# Altium PCB keyModule.PcbDoc
Units mil, origin at the board's own origin, x right, y up, seen from the top; angles counter-clockwise.
Board outline 3720 x 3700 mil, 2 copper layers (Top Layer, Bottom Layer); 95 components, 89 nets, 421 pads, 59 vias.
Unrouted connection lines stored in the file: 1.
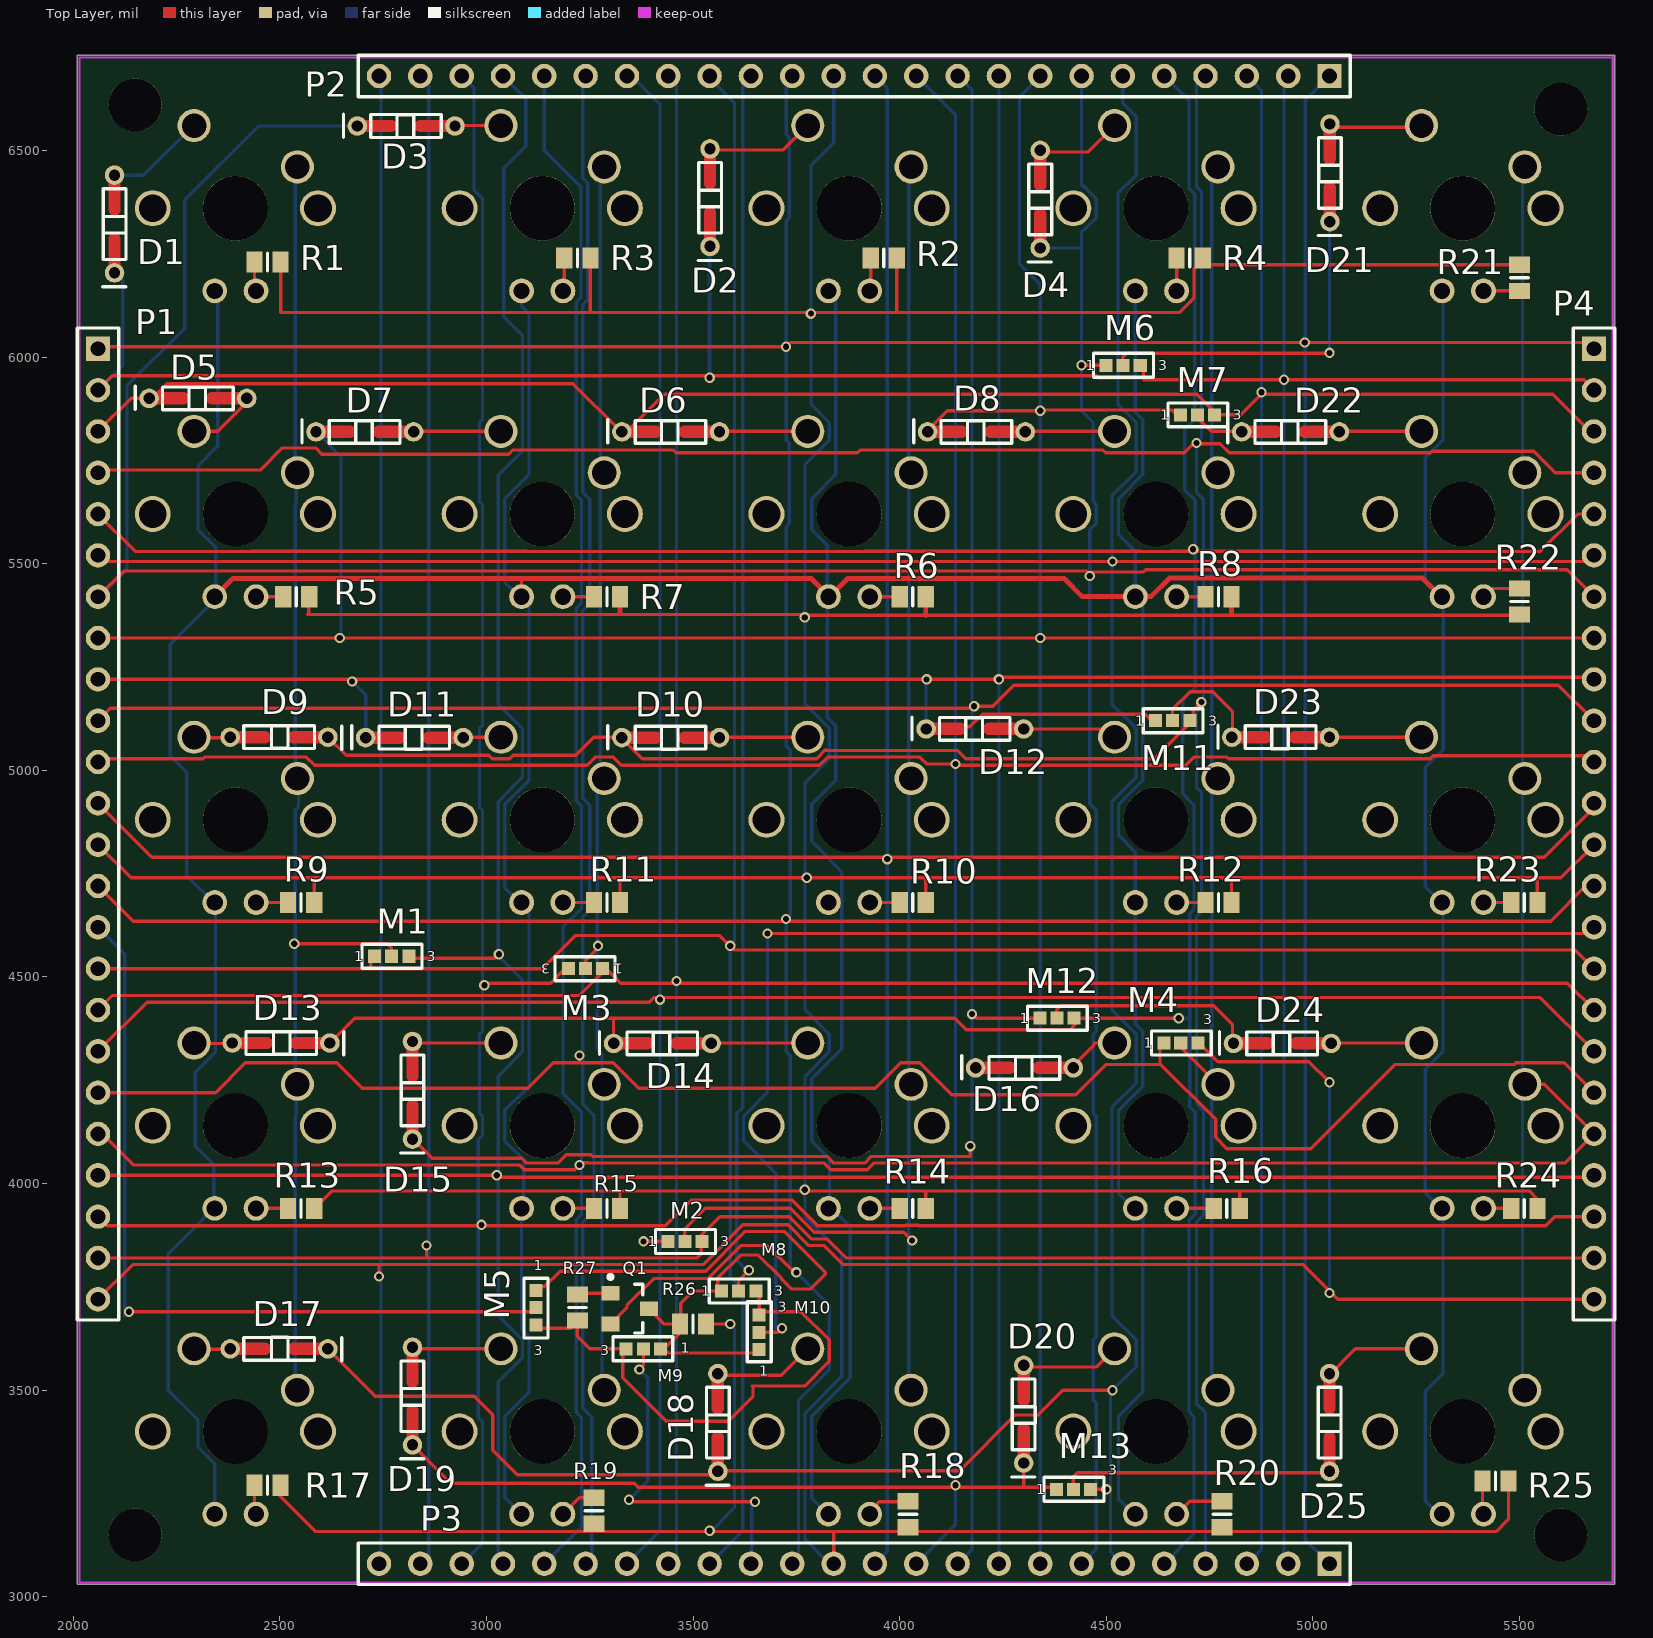
[diagram p0: Top Layer view]
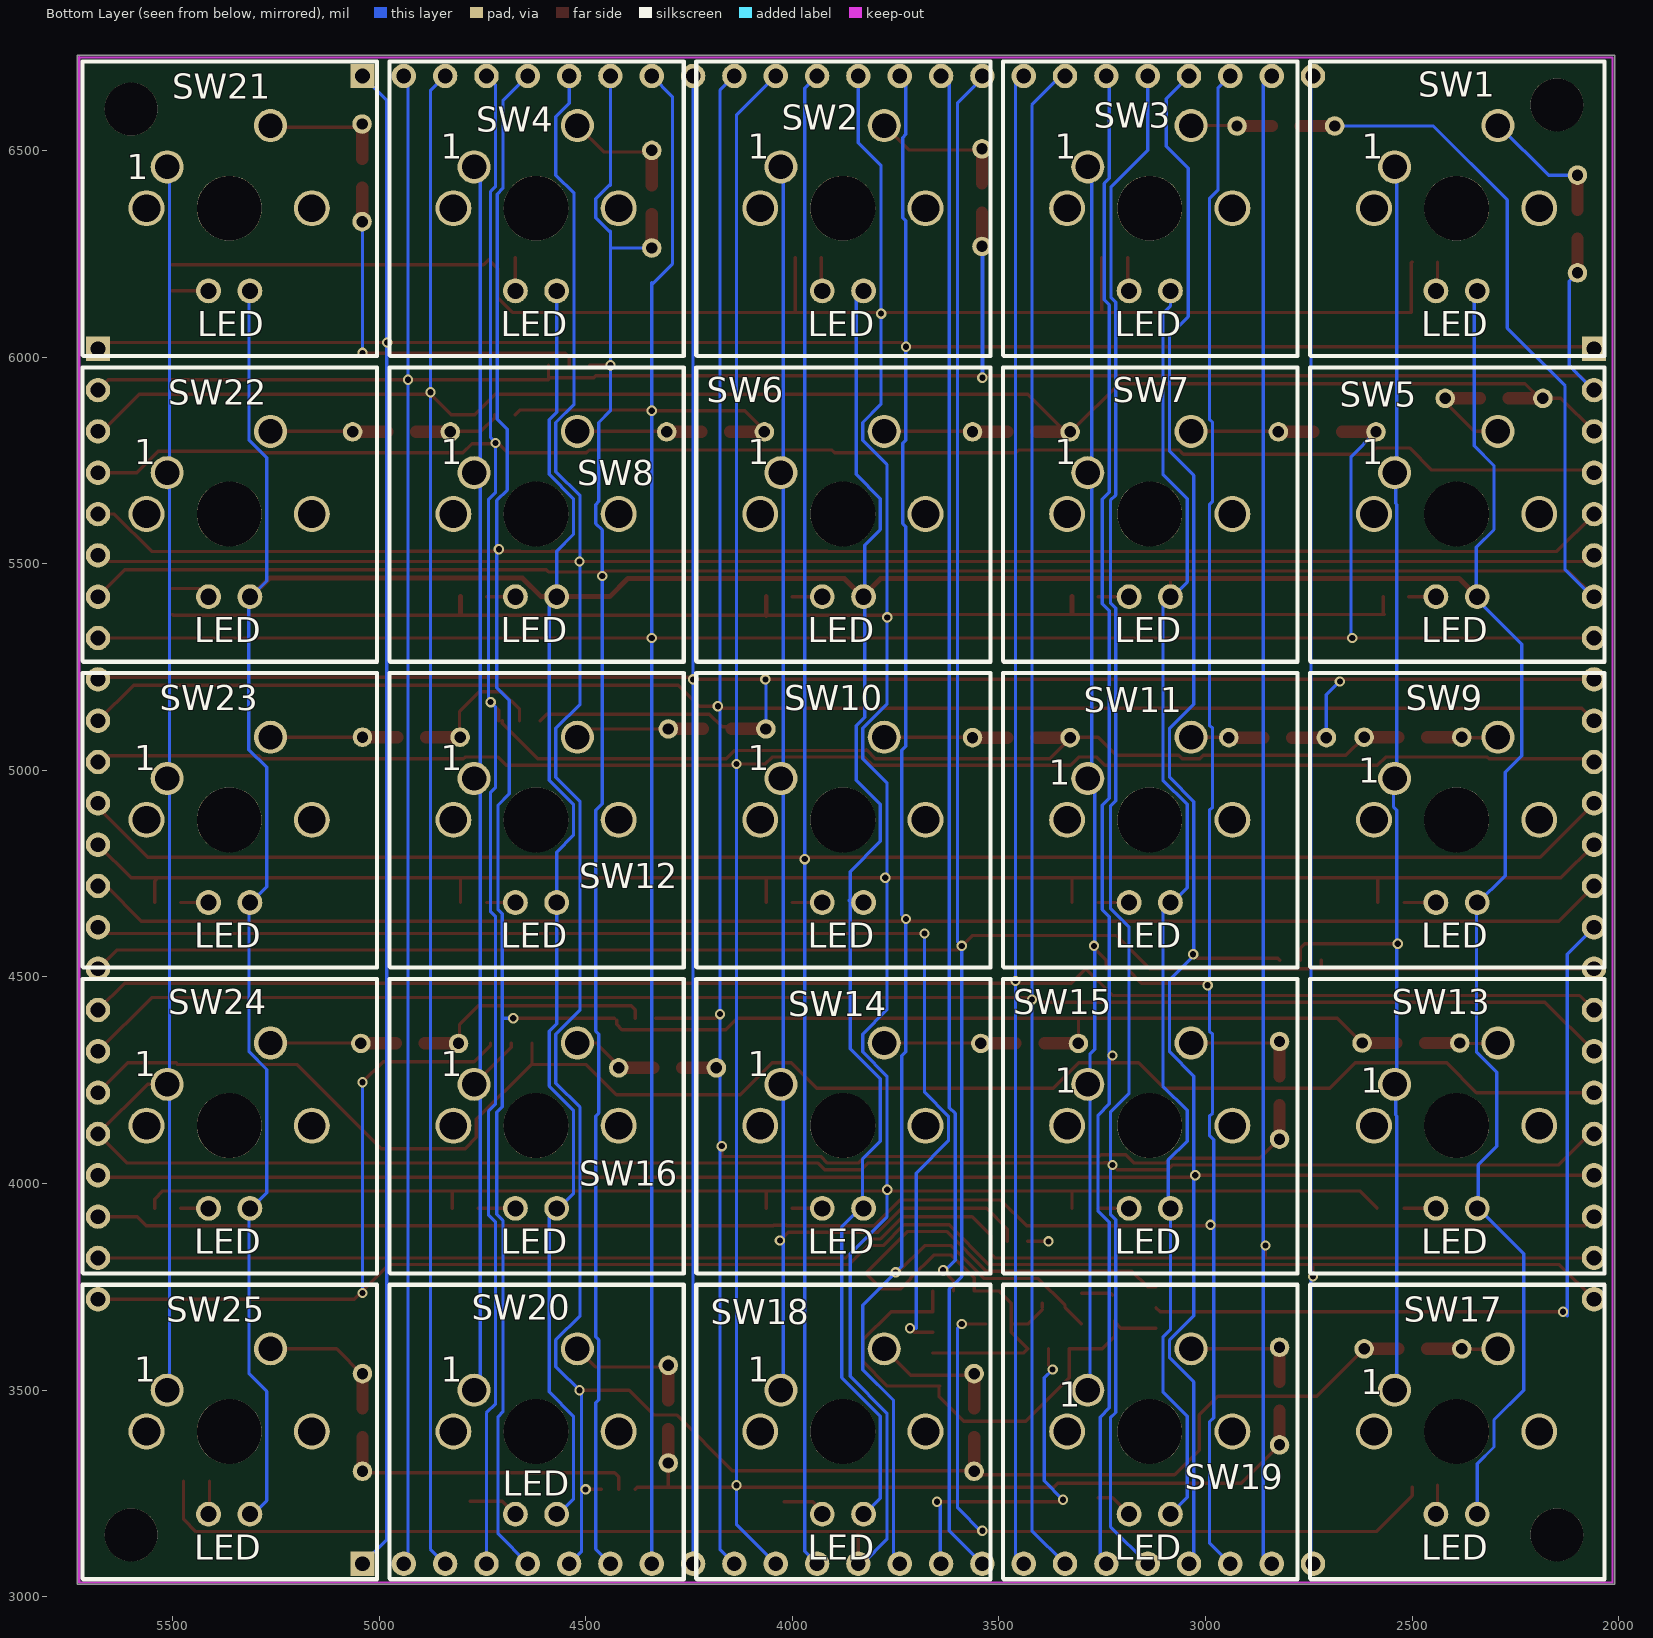
[diagram p1: Bottom Layer view, seen from below]

## Layer stack, top to bottom
Top Layer: signal copper 1.4
Dielectric: dielectric 12.6, FR-4, Dk 4.8
Bottom Layer: signal copper 1.4

## Board outline
2010,3030 5730,3030 5730,6730 2010,6730

## Design rules (kind name [scope] priority, off if disabled: settings)
Clearance [All] p1: gap=8
HoleSize [All] p1: absolutevalues=TRUE maxlimit=175 minlimit=1 maxpercent=80.000 minpercent=20.000
MinimumSolderMaskSliver [All] p1 off: minsoldermaskwidth=10
NetAntennae [All] p1 off: netantennaetolerance=30
PasteMaskExpansion [All] p1 off: expansion=0
PolygonConnect [All] p1: connectstyle=Relief reliefconductorwidth=10 reliefentries=4 polygonreliefangle="90 Angle"
RoomDefinition keyModule [InComponentClass('keyModule')] p1 off: confinementstyle=ConfineIn formatcopy=TRUE lockcomponents=FALSE outline 5790,2970 7780,2970 7780,3960 5790,3960
RoutingVias [All] p1: holewidth=12 width=25 viastyle="Through Hole" minholewidth=28 minwidth=50 maxholewidth=28 maxwidth=50
SilkToSilkClearance [All] p1: silktosilkclearance=1
SilkscreenOverComponentPads [All] p1 off: minsilkscreentomaskgap=20
SolderMaskExpansion [All] p1 off: expansion=4
Width [All] p1: maxlimit=100 minlimit=8 preferedwidth=8
22 further rules are at their usual default settings.

## Components (designator, comment, footprint, x,y, rotation, side; value= is the part's Value field where it differs from the comment)
D1 "1N4148" "AXIAL WITH SOD-323F"#1 2100,6320 r270 top
D2 "1N4148" "AXIAL WITH SOD-323F"#1 3541,6383.78 r270 top locked
D3 "1N4148" "AXIAL WITH SOD-323F"#1 2803.78,6559 r180 top locked
D4 "1N4148" "AXIAL WITH SOD-323F"#1 4340,6380 r270 top
D5 "1N4148" "AXIAL WITH SOD-323F"#1 2300,5900 r180 top locked
D6 "1N4148" "AXIAL WITH SOD-323F"#1 3443.78,5819 r180 top locked
D7 "1N4148" "AXIAL WITH SOD-323F"#1 2703.78,5819 r180 top locked
D8 "1N4148" "AXIAL WITH SOD-323F"#1 4183.78,5819 r180 top locked
D9 "1N4148" "AXIAL WITH SOD-323F"#1 2500,5080 r0 top locked
D10 "1N4148" "AXIAL WITH SOD-323F"#1 3443.78,5079 r180 top locked
D11 "1N4148" "AXIAL WITH SOD-323F"#1 2823.78,5079 r180 top locked
D12 "1N4148" "AXIAL WITH SOD-323F"#2 4180,5100 r180 top
D13 "1N4148" "AXIAL WITH SOD-323F"#1 2504.88,4340 r0 top locked
D14 "1N4148" "AXIAL WITH SOD-323F"#1 3423.78,4339 r180 top locked
D15 "1N4148" "AXIAL WITH SOD-323F"#1 2821,4223.78 r270 top locked
D16 "1N4148" "AXIAL WITH SOD-323F"#1 4300,4280 r180 top locked
D17 "1N4148" "AXIAL WITH SOD-323F"#1 2500,3600 r0 top locked
D18 "1N4148" "AXIAL WITH SOD-323F"#1 3560,3420 r270 top locked
D19 "1N4148" "AXIAL WITH SOD-323F"#3 2821,3483.78 r270 top locked
D20 "1N4148" "AXIAL WITH SOD-323F"#1 4300,3440 r270 top locked
D21 "1N4148" "AXIAL WITH SOD-323F"#1 5041,6443.78 r270 top locked
D22 "1N4148" "AXIAL WITH SOD-323F"#1 4943.78,5819 r180 top locked
D23 "1N4148" "AXIAL WITH SOD-323F"#1 4920,5080 r180 top locked
D24 "1N4148" "AXIAL WITH SOD-323F"#1 4923.78,4339 r180 top locked
D25 "1N4148" "AXIAL WITH SOD-323F"#1 5040,3420 r270 top locked
M1 "solder Mux" SOLDERSELECT 2720,4550 r0 top
M2 "solder Mux" SOLDERSELECT 3430,3860 r0 top
M3 "solder Mux" SOLDERSELECT 3290,4520 r180 top
M4 "solder Mux" SOLDERSELECT 4630,4340 r0 top
M5 "solder Mux" SOLDERSELECT 3120,3750 r270 top
M6 "solder Mux" SOLDERSELECT 4490,5980 r0 top
M7 "solder Mux" SOLDERSELECT 4670,5860 r0 top
M8 "solder Mux" SOLDERSELECT 3560,3740 r0 top
M9 "solder Mux" SOLDERSELECT 3430,3600 r180 top
M10 "solder Mux" SOLDERSELECT 3660,3590 r90 top
M11 "solder Mux" SOLDERSELECT 4610,5120 r0 top
M12 "solder Mux" SOLDERSELECT 4330,4400 r0 top
M13 "solder Mux" SOLDERSELECT 4370,3260 r0 top
P1 "Header 24" HDR1X24 2060,6020 r270 top locked
P2 "Header 24" HDR1X24 5040,6680 r180 top locked
P3 "Header 24" HDR1X24 5040,3080 r180 top locked
P4 "Header 24" HDR1X24 5680,6020 r270 top locked
Q1 "NPN_TRANSISTOR" SOT23-3 3300,3734.8 r0 top
R1 "Res Semi" RESC2012L 2470,6230 r180 top
R2 "Res Semi" RESC2012L 3961.5,6240 r180 top
R3 "Res Semi" RESC2012L 3220,6240 r180 top
R4 "Res Semi" RESC2012L 4701.5,6240 r180 top
R5 "Res Semi" RESC2012L 2540,5420 r180 top
R6 "Res Semi" RESC2012L 4031.5,5420 r180 top
R7 "Res Semi" RESC2012L 3291.5,5420 r180 top
R8 "Res Semi" RESC2012L 4771.5,5420 r180 top
R9 "Res Semi" RESC2012L 2551.5,4680 r180 top
R10 "Res Semi" RESC2012L 4031.5,4680 r180 top
R11 "Res Semi" RESC2012L 3291.5,4680 r180 top
R12 "Res Semi" RESC2012L 4771.5,4680 r180 top
R13 "Res Semi" RESC2012L 2551.5,3940 r180 top
R14 "Res Semi" RESC2012L 4031.5,3940 r180 top
R15 "Res Semi" RESC2012L 3291.5,3940 r180 top
R16 "Res Semi" RESC2012L 4791.5,3940 r180 top
R17 "Res Semi" RESC2012L 2470,3270 r180 top
R18 "Res Semi" RESC2012L 4020,3200 r90 top
R19 "Res Semi" RESC2012L 3260,3208.5 r90 top
R20 "Res Semi" RESC2012L 4780,3200 r90 top
R21 "Res Semi" RESC2012L 5500,6191.5 r270 top
R22 "Res Semi" RESC2012L 5500,5408.5 r90 top
R23 "Res Semi" RESC2012L 5511.5,4680 r180 top
R24 "Res Semi" RESC2012L 5511.5,3940 r180 top
R25 "Res Semi" RESC2012L 5441.5,3280 r180 top
R26 "Res Semi" RESC2012L 3500,3660 r0 top
R27 "Res Semi" RESC2012L 3220,3700 r90 top
SW1 "CherrySwitch" CherryMxSwitch 2542.5,6460 r180 bottom locked
SW2 "CherrySwitch" CherryMxSwitch 4027.5,6460 r180 bottom locked
SW3 "CherrySwitch" CherryMxSwitch 3285,6460 r180 bottom locked
SW4 "CherrySwitch" CherryMxSwitch 4770,6460 r180 bottom locked
SW5 "CherrySwitch" CherryMxSwitch 2542.5,5720 r180 bottom locked
SW6 "CherrySwitch" CherryMxSwitch 4027.5,5720 r180 bottom locked
SW7 "CherrySwitch" CherryMxSwitch 3285,5720 r180 bottom locked
SW8 "CherrySwitch" CherryMxSwitch 4770,5720 r180 bottom locked
SW9 "CherrySwitch" CherryMxSwitch 2542.5,4980 r180 bottom locked
SW10 "CherrySwitch" CherryMxSwitch 4027.5,4980 r180 bottom locked
SW11 "CherrySwitch" CherryMxSwitch 3285,4980 r180 bottom locked
SW12 "CherrySwitch" CherryMxSwitch 4770,4980 r180 bottom locked
SW13 "CherrySwitch" CherryMxSwitch 2542.5,4240 r180 bottom locked
SW14 "CherrySwitch" CherryMxSwitch 4027.5,4240 r180 bottom locked
SW15 "CherrySwitch" CherryMxSwitch 3285,4240 r180 bottom locked
SW16 "CherrySwitch" CherryMxSwitch 4770,4240 r180 bottom locked
SW17 "CherrySwitch" CherryMxSwitch 2542.5,3500 r180 bottom locked
SW18 "CherrySwitch" CherryMxSwitch 4027.5,3500 r180 bottom locked
SW19 "CherrySwitch" CherryMxSwitch 3285,3500 r180 bottom locked
SW20 "CherrySwitch" CherryMxSwitch 4770,3500 r180 bottom locked
SW21 "CherrySwitch" CherryMxSwitch 5512.5,6460 r180 bottom locked
SW22 "CherrySwitch" CherryMxSwitch 5512.5,5720 r180 bottom locked
SW23 "CherrySwitch" CherryMxSwitch 5512.5,4980 r180 bottom locked
SW24 "CherrySwitch" CherryMxSwitch 5512.5,4240 r180 bottom locked
SW25 "CherrySwitch" CherryMxSwitch 5512.5,3500 r180 bottom locked

## Footprints (in the part's own frame and the unit in brackets; to place one, negate y for a bottom-side part, rotate by r counter-clockwise, add the part's x,y. Pads: shape width x height; smd on the part's side, far side on the other; paste and mask are expansions set on the pad)
"AXIAL WITH SOD-323F"#1 [mm]
  round 1.2 hole 0.7: 1(2.952,0) 2(-3.048,0)
  Top Layer lines w0.762: 2.921,0 0.864,0 ; -0.914,0 -3.048,0
  silkscreen extent -2.21,-0.74 3.81,0.71
"AXIAL WITH SOD-323F"#2 [mm]
  round 1.2 hole 0.7: 1(2.952,0) 2(-3.048,0)
  Top Layer lines w0.762: 2.921,0 1.143,0 0.864,0 ; -0.914,0 -3.048,0
  silkscreen extent -2.21,-0.74 3.81,0.71
"AXIAL WITH SOD-323F"#3 [mm]
  round 1.2 hole 0.7: 1(2.952,0) 2(-3.048,0)
  Top Layer lines w0.762: 2.921,0 2.738,0 0.864,0 ; -0.914,0 -3.048,0
  silkscreen extent -2.21,-0.74 3.81,0.71
CherryMxSwitch [mil] "Cherry Mx Switch with holes for LED"
  round 80 hole 59: 1(0,0) 2(250,100)
  round 60 hole 39: 3(100,-300) 4(200,-300)
  round 87 hole 67: 5(-50,-100) 7(350,-100)
  round 157 hole 157 unplated: 6(150,-100)
  silkscreen extent -205,-458 508,255
HDR1X24 [mm] "Connector; Header; 24 Position"
  rect 1.5x1.5 hole 0.9: 1(0,0)
  round 1.5 hole 0.9: 2(2.54,0) 3(5.08,0) 4(7.62,0) 5(10.16,0) 6(12.7,0) 7(15.24,0) 8(17.78,0) 9(20.32,0) 10(22.86,0) 11(25.4,0) 12(27.94,0) 13(30.48,0) 14(33.02,0) 15(35.56,0) 16(38.1,0) 17(40.64,0) 18(43.18,0) 19(45.72,0) 20(48.26,0) 21(50.8,0) 22(53.34,0) 23(55.88,0) 24(58.42,0)
  silkscreen extent -1.27,-1.27 59.69,1.27
RESC2012L [mm] "Chip Resistor, Body 2.0x1.3mm, IPC High Density"
  rect 1x1.3 smd: 1(-0.8,0) 2(0.8,0)
  silkscreen extent 0,-0.55 0,0.55, body extent -1.07,-0.7 1.07,0.7, height 2.54
SOLDERSELECT [mm]
  rect 0.8x0.8 smd: 1(0.229,0) 2(1.27,0) 3(2.337,0)
  silkscreen extent -0.53,-0.74 3.15,0.74
SOT23-3 [mm] "SOT23, 3-Leads, Body 3.0x2.8mm (max), Pitch 0.95mm, IPC Medium Density"
  rect 1.1x0.9 smd: 1(0,0) 2(0,-1.9) 3(2.36,-0.95)
  silkscreen extent -0.12,-2.45 1.98,1.12, body extent 0.38,-2.47 1.98,0.57, height 1.4

## Part data
D1 D2 D3 D4 D5 D6 D7 D8 D9 D10 D11 D12 D13 D14 D15 D16 D17 D18 D19 D20 D21 D22 D23 D24 D25: library part 5283, "Diode, 1N4148, 75V, 0.4 in., DO-35, 150mA, Switching, 500mW, Any"
P1 P2 P3 P4: "Header, 24-Pin"
Q1: library part 265442, "Transistor, MMBT4401, 40V, SOT23-3, 500mA, NPN, Transistor, On Semi: MMBT4401LT1"
R1 R2 R3 R4 R5 R6 R7 R8 R9 R10 R11 R12 R13 R14 R15 R16 R17 R18 R19 R20 R21 R22 R23 R24 R25 R26 R27: "Semiconductor Resistor"
SW1 SW2 SW3 SW4 SW5 SW6 SW7 SW8 SW9 SW10 SW11 SW12 SW13 SW14 SW15 SW16 SW17 SW18 SW19 SW20 SW21 SW22 SW23 SW24 SW25: "Cherry MX Switch layout"

## Free pads (board coordinates)
  round 128 hole 128: 0(2150,3150) 0(2150,6610) 0(5600,3150) 0(5600,6600)

## Via types
v1: diameter 25, hole 15, Top Layer to Bottom Layer, 59 vias

## Nets (pads, with @x,y where several pads share a name; then routed paths per layer and width w, separated by ;. In a path a pad name is that pad's centre, name@x,y a point inside that pad or via, vN(x,y) a via of type N, cw(c..) or ccw(c..) an arc to the next point about the centre after c; other vN are vias at no path point)
+5: P1.13 P2.13 P3.13 P4.13 R1.1 R2.1 R3.1 R4.1 R5.1 R6.1 R7.1 R8.1 R9.1 R10.1 R11.1 R12.1 R13.1 R14.1 R15.1 R16.1 R17.1 R18.1 R19.1 R20.1 R21.1 R22.1 R23.1 R24.1 R25.1 R26.2 | length 21380.4
  Top Layer w8: P1.13 2140,4740 5600,4740 P4.13 ; R17.1@2500,3265 2500,3245 2587,3158 5443,3158 5472.99,3187.99 R25.1 ; R1.1@2500,6230 2502.25,6227.75 2502.25,6107.75 4677.15,6107.75 4712,6142.6 4712,6212 4735,6235 4747.01,6222.99 R21.1 ; R5.1@2570,5420 2570,5380 2567.01,5377.01 v1@3770,5377.01 ; R9.1 2582.99,4737.99 ; R13.1@2585,3940 2627,3982 5523,3982 5542.99,3962.01 R24.1 ; 3250,6110 3251.5,6111.5 R3.1 ; R15.1 3322.99,3977.99 ; R11.1 3322.99,4737.99 ; R26.2 v1(3590,3660) ; v1(3770,5370) v1@3770,5377.01 ; P3.13 3840,3153.1 ; 3992.99,6112.01 R2.1 ; R14.1 4062.99,3977.99 ; R10.1 4062.99,4737.99 ; R12.1 4802.99,4737.01 ; R16.1 4822.99,3977.99 ; R22.1 5497.99,5375 4062.99,5375 3772.01,5375 v1@3770,5377.01 ; 5535,4740 5542.99,4732.01 R23.1
  Top Layer w12: 3322.99,5382.01 R7.1 ; 4062.99,5375 R6.1 ; 4802.99,5382.01 R8.1
  Bottom Layer w8: v1(3540,3160) 3540,3155 3600,3215 3600,3650 v1(3590,3660) v1@3584,3654 ; v1(3770,3985) v1@3771,3985 ; v1(3775,4740) v1@3771,4740 ; v1@3780,6099.5 v1@3785.5,6105 ; P3.13 3830,3080 3771,3139 3771,3444.11 3860,3533.11 3860,3830 3771,3919 v1@3771,3985 ; P2.13 3840,6518.5 3785.5,6464 v1@3785.5,6105 ; v1@3771,3985 3771,4259.96 3829.5,4318.46 3829.5,4361.54 3771,4420.04 v1@3771,4740 ; v1@3771,4740 3771,4969.5 3829.5,5028 3829.5,5101.54 3771,5160.04 3771,5739.96 3829.5,5798.46 3829.5,5841.54 3785.5,5885.54 v1@3785.5,6105
  other v1: 3785,6105
COLUMN1: M1.2 SW1.1 SW5.1 SW9.1 SW13.1 SW17.1 | length 3244.3
  Top Layer w8: v1(2535,4580) 2760,4580 2770,4570 M1.2@2770,4540
  Bottom Layer w8: SW17.1@2540,3500 2537,3503 2537,4162.99 2540,4165.99 2540,4240 2537,4243 2537,4902.99 2545,4910.99 2545,4975 2537,4983 2537,5642.99 2540,5645.99 2540,5720 2537,5723 2537,6454.5 SW1.1
COLUMN2: M3.2 SW3.1 SW7.1 SW11.1 SW15.1 SW19.1 | length 3041.4
  Top Layer w8: M3.2 3240,4540 3270,4570 v1(3270,4575)
  Bottom Layer w8: SW19.1 3279.5,3505.5 3279.5,4313.9 3268.16,4325.24 3268.16,4958.16 3275,4965 3275,6450 SW3.1
COLUMN3: M2.2 SW2.1 SW6.1 SW10.1 SW14.1 SW18.1 | length 3597.3
  Top Layer w8: M2.2 3480,3890 3530,3940 3735,3940 3793,3882 4010,3882 v1(4030,3862)
  Bottom Layer w8: SW18.1@4022,3498 4022,6454.5 SW2.1
COLUMN4: M4.2 SW4.1 SW8.1 SW12.1 SW16.1 SW20.1 | length 3106.9
  Top Layer w8: M4.2 4680,4330 SW16.1
  Bottom Layer w8: SW4.1@4764.5,6459.5 4755,6450 4755,3515 SW20.1
GND: P1.1 P1.14 P2.1 P2.14 P3.1 P3.14 P4.1 P4.14 Q1.2 | length 15236.3
  Top Layer w8: P1.14 2145,4635 5575,4635 5660,4720 P4.14 ; P1.1 2065,6025 v1(3725,6025) 3735,6035 5665,6035 P4.1 ; Q1.2 3340,3700 3340,3705 3405,3770 3535.25,3770 3615.25,3850 3680,3850 3742,3788 3747,3788 v1(3750,3785)
  Bottom Layer w8: P3.14 3755,3095 3755,3475 3829.5,3549.5 3829.5,3705.5 3735,3800 3735,4308.96 3725.5,4318.46 3725.5,4640.5 3735,4650 3735,5048.96 3725.5,5058.46 3725.5,5589.51 3733,5597.01 3733,5790.96 3725.5,5798.46 3725.5,6329.51 3733,6337.01 3733,6530.96 3725.5,6538.46 3725.5,6665.5 P2.14 ; P3.1 4981.53,3138.47 4981.53,6621.53 P2.1
  other v1: 3725,4640 4980,6035
KEYINPUT0: D1.1 D2.1 M6.3 P1.2 P2.2 P3.2 P4.2 | length 7923.1
  Top Layer w8: P1.2 2095,5955 4475.53,5955 4480.53,5950 4590,5950 M6.3@4590,5980 ; 4590,5945 v1(4930,5945) 5655,5945 P4.2
  Bottom Layer w8: P1.2 2100,5960 ; D1.1 2120,6183.78 2120,5980 2100,5960 ; 2101.53,5961.53 2100,5960 ; P3.2 4930,3090 v1(4930,5945) ; P2.2 4930,6670 v1@4930,5950 ; v1(4930,5945) v1@4930,5950 ; v1(4930,5945) v1@4930,5950
  Bottom Layer w10: v1(3540,5950) D2.1@3540,6263.78
KEYINPUT1: D5.1 D6.1 M7.3 P1.3 P2.3 P3.3 P4.3 | length 7457
  Top Layer w8: P1.3 2140,5900 2191.38,5900 2227,5935.62 3209.38,5935.62 3320,5825 3345,5825 3430,5910 4718.47,5910 4768.47,5860 4825,5860 4875,5910 5580,5910 5670,5820 P4.3
  Bottom Layer w8: P3.3 4875.5,3115.5 v1(4875.5,5914.5) 4875.5,6644.5 P2.3
KEYINPUT2: D9.1 D10.1 M11.3 P1.4 P2.4 P3.4 P4.4 | length 9639.9
  Top Layer w8: P1.4 2066.5,5726.5 2452.83,5726.5 2506.33,5780 2586.5,5780 2601.5,5765 3053.54,5765 3063.54,5775 3451.65,5775 3458.65,5768 3897.51,5768 3904.51,5775 4491.46,5775 4498.46,5768 4688,5768 4710,5790 4775,5790 4797,5768 5284.04,5768 5288.04,5772 5534.04,5772 5586.04,5720 P4.4 ; D9.1 2660.22,5036 3005.46,5036 3013.46,5028 3056.54,5028 3064.54,5036 3216,5036 3260,5080 3325,5080 3377,5028 3799.04,5028 3819.04,5048 ; 3820.52,5049.48 3822,5048 4139.33,5048 4159.33,5028 4410,5028 ; 4405,5028 4410,5028 ; M11.3 4702,5113.53 4616.47,5028 4410,5028 ; M11.3@4710,5120 4710,5145 v1(4730,5165)
  Bottom Layer w8: v1(4718,5792) v1@4718,5790 ; P3.4 4740,3445 4718,3467 4718,3905.98 4735,3922.98 4735,4175.61 4718,4192.61 4718,4645.98 4730,4657.98 4730,4946.46 4718,4958.46 4718,5153 4735,5170 4735,5655.61 4718,5672.61 v1@4718,5790 ; P2.4 4718,6658 4718,6412.61 4730,6400.61 4730,5805 4718,5793 v1@4718,5790
KEYINPUT3: D13.1 D14.1 M12.3 P1.5 P2.5 P3.5 P4.5 | length 9617.8
  Top Layer w8: P1.5 2150.5,5529.5 2429.99,5529.5 2430.49,5530 3097.01,5530 3097.51,5529.5 3914.99,5529.5 3915.49,5530 4582.01,5530 4582.51,5529.5 4657.49,5529.5 4657.99,5530 4930,5530 4930.5,5529.5 5550.49,5529.5 5640.99,5620 P4.5 ; D13.1 2681.1,4400 4132.67,4400 4160.42,4372.25 4412.25,4372.25 4425,4385 M12.3@4425,4395 ; D14.1 3307.56,4400 ; M12.3@4430,4400 v1(4675,4400)
  Bottom Layer w8: P3.5 4712,3152 4712,3435.99 4700,3447.99 4700,3910.6 4715,3925.6 4715,4172.99 4702,4185.99 4702,4652.6 4712,4662.6 4712,4915.99 4685,4942.99 4685,5170 4715,5200 v1@4715,5530 ; P2.5 4700,6620 4700,6407.99 4714,6393.99 4714,5849 4690,5825 4690,5677.99 4715,5652.99 v1@4715,5530 ; v1(4675,4400) 4700,4400 ; v1(4710,5535) 4710,5530 v1@4715,5530
KEYINPUT4: D17.1 D18.1 M13.3 P1.6 P2.6 P3.6 P4.6 | length 9663.5
  Top Layer w8: P1.6 2075,5505 v1@4506.5,5505 ; D17.1 2731.22,3485 2970,3485 3015,3440 3015,3355 3075,3295 3550,3295 3560,3305 4145,3305 4280,3440 4335,3440 4395,3500 v1(4515,3500) ; M13.3 v1@4505,3260 ; v1@4515,5513.5 4523.5,5505 5665,5505 P4.6
  Bottom Layer w8: P3.6 4510,3110 4510,3495 4572,3557 4572,3621.54 4513.5,3680.04 4513.5,4184.11 4572,4242.61 4572,4361.54 4513.5,4420.04 4513.5,4924.11 4572,4982.61 4572,5101.54 4513.5,5160.04 4513.5,5664.11 4572,5722.61 4572,5841.54 4528,5885.54 4528,6395.99 4572,6439.99 4572,6581.54 4540,6613.54 P2.6
  other v1: 4500,3260 4515,5505
KEYINPUT5: D3.1 D4.1 M6.1 P1.7 P2.7 P3.7 P4.7 | length 9086.4
  Top Layer w8: P1.7 2122,5482 4453,5482 v1@4460,5475 ; v1(4440,5980) M6.1@4490,5980 ; v1(4460,5470) v1@4460,5475 ; P4.7 5615,5485 4595,5485 4590,5480 4465,5480 v1@4460,5475
  Bottom Layer w8: P1.7@2060,5415 2130,5485 2130,5930 2270,6070 2270,6380 2449,6559 D3.1 ; D4.1 4438.78,6263.78 4440,6265 ; P3.7 4430,3090 4450,3090 4475.5,3115.5 4475.5,3469.5 4468,3477 4468,3621.54 4475.5,3629.04 4475.5,4162.99 4468,4170.49 4468,4361.54 4475.5,4369.04 4475.5,4902.99 4460,4918.49 v1(4460,5470) 4460,5581.51 4475.5,5597.01 4475.5,5642.99 4468,5650.49 4468,5841.54 4440,5869.54 v1(4440,5980) 4440,6265 ; P2.7 4440,6415.5 4442.99,6415.5 4475.5,6382.99 4475.5,6337.01 4442.99,6304.5 4440,6304.5 4440,6265
KEYINPUT6: D7.1 D8.1 M7.1 P1.8 P2.8 P3.8 P4.8 | length 8426.2
  Top Layer w8: P1.8 v1(2645,5320) v1(4340,5320) P4.8 ; D8.1@4065,5820 4115,5870 v1(4340,5870) 4342,5872 4658,5872 M7.1@4670,5860
  Bottom Layer w8: D7.1 2648,5758.56 v1@2648,5320 ; v1(2645,5320) v1@2648,5317 ; P3.8 v1(4340,5320) v1(4340,5870) 4340,6175 ; 4340,6180 4340,6175 ; P2.8 4290,6630 4290,6225 4340,6175
KEYINPUT7: D11.1 D12.1 M11.1 P1.9 P2.9 P3.9 P4.9 | length 7990.4
  Top Layer w8: P1.9 v1(4240,5220) 4245,5225 5675,5225 P4.9 ; 4135,5100 4140,5105 4170,5105 4200.62,5135.62 4594.38,5135.62 M11.1@4610,5120
  Bottom Layer w8: v1(2675,5215) 2707.56,5182.44 D11.1 ; D12.1 4063.78,5218.78 v1(4065,5220) ; P3.9 P2.9
KEYINPUT8: D15.1 D16.1 M12.1 P1.10 P2.10 P3.10 P4.10 | length 8901.5
  Top Layer w8: P1.10 2090,5150 4175,5150 v1(4180,5155) 4225,5155 4276,5206 5594,5206 P4.10 ; D15.1 2822.44,4107.56 2869,4061 3086.01,4061 3097.51,4049.5 3172.49,4049.5 3192.99,4070 3252.33,4070 3256.83,4065.5 3824.01,4065.5 3840.01,4049.5 3914.99,4049.5 3930.99,4065.5 4170.5,4065.5 v1(4170.5,4090.5) ; v1(4175,4410) 4185,4400 M12.1@4330,4400
  Bottom Layer w8: P3.10 4175,3115 v1(4175,4410) 4175,6645 P2.10
KEYINPUT9: D19.1 D20.1 M13.1 P1.11 P2.11 P3.11 P4.11 | length 9039.1
  Top Layer w8: P1.11 2068,5028 2314.04,5028 2318.04,5032 2564.04,5032 2584.04,5012 3243.46,5012 3263.46,5032 3306.54,5032 3326.54,5012 3805.67,5012 3825.67,5032 4049.04,5032 4066.04,5015 4130,5015 4133,5012 4692,5012 4712,5032 4791.54,5032 4795.54,5028 5284.04,5028 5291.04,5035 5665,5035 P4.11 ; D19.1@2821,3376 D19.1 2913.56,3275 3357.33,3275 3367.33,3265 4130,3265 v1(4135,3270) 4140,3265 4300,3265 ; D20.1 4300,3265 ; M13.1@4380,3260 4375,3265 4300,3265
  Bottom Layer w8: P3.11 4135,3175 v1(4135,3270) v1(4135,5015) 4135,6585 P2.11
KEYINPUT10: P1.12 P2.12 P3.12 P4.12 | length 7363.3
  Top Layer w8: P1.12 2190.5,4789.5 v1@3970,4789.5 ; v1(3970,4785) v1@3970,4789.5 ; P4.12 5680,4910 5559.5,4789.5 v1@3970,4789.5
  Bottom Layer w8: P3.12 3970,3110 3970,6650 P2.12
KEYOUTPUT0: M1.1 P1.16 P2.16 P3.16 P4.16 | length 7380.8
  Top Layer w8: P1.16 2720,4520 ; M1.1@2720,4540 2720,4520 ; P4.16 5635,4565 3600,4565 3565,4600 3215,4600 3135,4520 2720,4520
  Bottom Layer w8: P3.16 3620,3160 3620,3745 3590,3775 v1(3590,4575) 3600,4585 3600,6615 3540,6675 P2.16
KEYOUTPUT1: M3.1 P1.17 P2.17 P3.17 P4.17 | length 7307.8
  Top Layer w8: P1.17 2095,4455 3225,4455 3290,4520 3325,4485 v1@3460,4485 ; v1(3460,4490) v1@3460,4485 ; P4.17 5615,4485 v1@3460,4485
  Bottom Layer w8: P3.17@3460,3080 v1(3460,4490) P2.17@3460,6680
KEYOUTPUT2: M2.1 P1.18 P2.18 P3.18 P4.18 | length 7449.8
  Top Layer w8: P1.18 2179,4439 3394,4439 3405,4450 5550,4450 P4.18 ; v1(3380,3860) M2.1@3430,3860
  Bottom Layer w8: P3.18 3420,3160 3420,6610 3350,6680 P2.18
  other v1: 3420,4445
KEYOUTPUT3: M4.1 P1.19 P2.19 P3.19 P4.19 | length 7786.4
  Top Layer w8: P1.19 2344.51,4220 2416.51,4292 2638,4292 2699.5,4230.5 3100.5,4230.5 3162,4292 3225,4292 ; v1(3225,4310) 3225,4292 ; 4630,4290 M4.1@4630,4340 ; P4.19 5608,4292 5490.96,4292 5486.96,4288 5198,4288 4994.5,4084.5 4791.51,4084.5 4764.5,4111.51 4764.5,4155.5 4632,4288 4498.46,4288 4425.46,4215 4126.04,4215 4049.04,4292 4002,4292 3940.5,4230.5 3368.04,4230.5 3306.54,4292 3225,4292
  Bottom Layer w8: P3.19 3255,3095 3255,3435 3233,3457 3233,3905.98 3260,3932.98 3260,4165.61 3233,4192.61 3233,4645.98 3250,4662.98 3250,4915.61 3233,4932.61 3233,5385.98 3250,5402.98 3250,5655.61 3233,5672.61 3233,6125.98 3245,6137.98 3245,6420 3233,6432 3233,6673 P2.19
KEYOUTPUT4: P1.20 P2.20 P3.20 P4.20 SW21.1 SW22.1 SW23.1 SW24.1 SW25.1 | length 10627.4
  Top Layer w8: P1.20 2070,4120 2145,4045 3079.39,4045 3090.89,4033.5 3213.5,4033.5 v1(3225,4045) 3230,4050 3245,4050 ; 3245,4049.5 3817.39,4049.5 3833.39,4033.5 3921.61,4033.5 3937.61,4049.5 5609.5,4049.5 P4.20 5560,4240 SW24.1 SW24.1@5510,4240
  Bottom Layer w8: P3.20 3230,3170 3230,3432.99 3217,3445.99 3217,3912.6 3230,3925.6 3230,4172.99 3185,4217.99 3185,4620.6 3230,4665.6 3230,4912.99 3217,4925.99 3217,5392.6 3230,5405.6 3230,5652.99 3217,5665.99 3217,6132.6 3229,6144.6 3229,6411 3140,6500 P2.20 ; SW25.1@5507,3503 5507,6454.5 SW21.1
KEYOUTPUT5: M1.3 P1.21 P2.21 P3.21 P4.21 | length 7683.1
  Top Layer w8: P1.21 v1@3030,4020 ; M1.3@2820,4540 2825,4545 3020,4545 v1(3030,4555) ; v1(3025,4020) v1@3030,4020 ; P4.21 5675,4015 3035,4015 v1@3030,4020
  Bottom Layer w8: P3.21 3028.5,3091.5 3028.5,3519.96 3087,3578.46 3087,3621.54 3028.5,3680.04 3028.5,4259.96 3087,4318.46 3087,4493 3028.5,4551.5 3028.5,4924.11 3087,4982.61 3087,5101.54 3028.5,5160.04 3028.5,5713.5 3087,5772 3087,6053 3042,6098 3042,6457 3095,6510 3095,6625 P2.21
KEYOUTPUT6: M3.3 P1.22 P2.22 P3.22 P4.22 | length 7574
  Top Layer w8: P1.22 2082,3898 v1@2990,3898 ; v1(2988,3900) v1@2990,3898 ; v1(2995,4480) 3000,4485 3155,4485 M3.3@3190,4520 ; P4.22 5585.24,3920 5563.24,3898 4046.33,3898 4045.33,3899 4014.67,3899 4013.67,3898 3802,3898 3740,3960 3495,3960 3433,3898 v1@2990,3898
  Bottom Layer w8: P3.22 2990.5,3130.5 2990.5,3422.99 2980,3433.49 2980,4106.51 2990.5,4117.01 2990.5,4162.99 2983,4170.49 2983,4361.54 2990.5,4369.04 2990.5,4902.99 2983,4910.49 2983,5101.54 2990.5,5109.04 2990.5,5642.99 2983,5650.49 2983,5841.54 2990.5,5849.04 2990.5,6382.99 2970,6403.49 2970,6650 P2.22
KEYOUTPUT7: M2.3 P1.23 P2.23 P3.23 P4.23 | length 7375.8
  Top Layer w8: P1.23 2855,3820 ; v1(2855,3850) 2855,3820 ; P4.23 3870,3820 3824,3866 3786.37,3866 3732.37,3920 3565,3920 3520,3875 3520,3830 3510,3820 2855,3820
  Bottom Layer w8: P3.23 2860,3100 2860,6660 P2.23
KEYOUTPUT8: M4.3 P1.24 P2.24 P3.24 P4.24 | length 8260.4
  Top Layer w8: P1.24 2144,3804 2740,3804 ; v1(2740,3775) 2740,3804 ; M4.3@4730,4340 4730,4335 4770,4295 4990,4295 v1(5040,4245) ; P4.24 5060,3720 4976,3804 3863.37,3804 3817.37,3850 3779.75,3850 3729.75,3900 3620,3900 3524,3804 2740,3804
  Bottom Layer w8: P3.24@2745,3080 P2.24@2745,6680 ; v1(5040,3735) v1(5040,4245)
LED_GND: SW1.4 SW2.4 SW3.4 SW4.4 SW5.4 SW6.4 SW7.4 SW8.4 SW9.4 SW10.4 SW11.4 SW12.4 SW13.4 SW14.4 SW15.4 SW16.4 SW17.4 SW18.4 SW19.4 SW20.4 SW21.4 SW22.4 SW23.4 SW24.4 SW25.4 | length 19001.4
  Top Layer w8: SW7.4 3085,5464 3085,5465
  Top Layer w12: SW5.4 2386.5,5464 3085,5464 3786,5464 3830,5420 3874,5464 4398,5464 4442,5420 SW8.4 4607.77,5420 4652.77,5465 5265,5465 SW22.4@5310,5420
  Bottom Layer w8: SW1.4@2340,6160 2350,6150 2350,5785 2302,5737 2302,5582.51 2345,5539.51 2345,5415 2235,5305 2235,5035 2275,4995 2275,4745 2344.5,4675.5 2344.5,4318.46 2295,4268.96 2295,4090 2340,4045 2340,3940 2230,3830 2230,3500 2302,3428 2302,3362.51 2342.5,3322.01 SW17.4 ; SW19.4 3044.5,3240.5 3044.5,3437.49 3103,3495.99 3103,3628.17 3085,3646.17 SW15.4 3090,3945 3090,4057.01 3044.5,4102.51 3044.5,4177.49 3103,4235.99 3103,4657 3044.5,4715.5 3044.5,4917.49 3103,4975.99 3103,5397 3044.5,5455.5 3044.5,5657.49 3103,5715.99 3103,6105.23 3085,6123.23 SW3.4 ; SW2.4@3825,6160 3845.5,6139.5 3845.5,5715.99 3787,5657.49 3787,5582.51 3825,5544.51 3825,5128.67 3845.5,5108.17 3845.5,4975.99 3787,4917.49 3787,4828 3860,4755 3860,4685 ; SW18.4 3825,3200 3787,3238 3787,3437.49 3880,3530.49 3880,3895 3835,3940 3830,3940 3830,4059.51 3787,4102.51 3787,4253.33 3860,4326.33 3860,4680 ; SW20.4@4570,3195 4529.5,3235.5 4529.5,3437.49 4588,3495.99 4588,3917 4529.5,3975.5 4529.5,4177.49 4588,4235.99 4588,4368.17 4570,4386.17 4570,4802.01 4529.5,4842.51 4529.5,4917.49 4588,4975.99 4588,5397 4570,5415 4570,5530 4529.5,5570.5 4529.5,5657.49 4588,5715.99 4588,5848.17 4570,5866.17 SW4.4 ; SW25.4 5305,3200 5272,3233 5272,3497 5314.5,3539.5 5314.5,3939.5 5315,3940 5310,3940 5272,3978 5272,4275.96 5314.5,4318.46 5314.5,4675.5 5272,4718 5272,5007 5315,5050 5315,5415 5272,5458 5272,5755.96 5314.5,5798.46 5314.5,6159.5 SW21.4@5315,6160
  Bottom Layer w12: SW10.4 3855,4680 3860,4685
LED_PWM_IN: M5.3 M8.3 M9.3 M10.3 R27.1 | length 1256.2
  Top Layer w8: M5.3@3120,3650 3205,3650 R27.1@3220,3665 ; R27.1 R27.1@3220,3665 ; 3643.35,3510 3645,3510 ; M8.3@3660,3740 3660,3690 3761.04,3690 3829.5,3621.54 3829.5,3569.5 3770,3510 3645,3510 ; R27.1@3220,3665 3220,3630 3250,3600 3330,3600 3330,3530 3435,3425 3585,3425 3645,3485 3645,3510
LED_PWM_OUT: M5.1 M8.1 M9.1 M10.1 Q1.3 R26.1 | length 1728.8
  Top Layer w8: M5.1@3120,3750 3140,3750 3178,3788 3530.63,3788 3626.63,3884 3721,3884 3820,3785 3820,3780 3785,3745 3737.67,3745 3713,3769.67 3713,3772 3658,3827 3614.88,3827 3560,3772.12 3560,3740 3500,3740 3470,3710 R26.1@3470,3660 ; Q1.3@3395,3695 3430,3660 R26.1 R26.1@3470,3660 ; Q1.3@3395,3700 Q1.3@3395,3710 ; M10.1@3660,3590 3440,3590 3430,3600 3470,3640 R26.1@3470,3660
NetD1_2: D1.2 SW1.2 | length 242.2
  Bottom Layer w8: D1.2 2170,6440 2290,6560 SW1.2
NetD2_2: D2.2 SW2.2 | length 262.9
  Top Layer w8: D2.2@3539,6501.1 3718.6,6501.1 SW2.2
NetD3_2: D3.2 SW3.2 | length 115
  Top Layer w8: D3.2@2920,6560 SW3.2
NetD4_2: D4.2 SW4.2 | length 211.4
  Top Layer w8: D4.2@4335,6496.22 4456.22,6496.22 SW4.2
NetD5_2: D5.2 SW5.2 | length 166.5
  Top Layer w8: SW5.2 2350,5820 2420,5890 D5.2
NetD6_2: D6.2 SW6.2 | length 217.5
  Top Layer w8: D6.2@3560,5820 SW6.2
NetD7_2: D7.2 SW7.2 | length 215
  Top Layer w8: D7.2@2820,5820 SW7.2
NetD8_2: D8.2 SW8.2 | length 220
  Top Layer w8: D8.2@4300,5820 SW8.2
NetD9_2: D9.2 SW9.2 | length 91.7
  Top Layer w8: SW9.2 2293.5,5079 D9.2@2383.78,5079
NetD10_2: D10.2 SW10.2 | length 217.5
  Top Layer w8: D10.2@3560,5080 SW10.2
NetD11_2: D11.2 SW11.2 | length 95
  Top Layer w8: D11.2@2940,5080 SW11.2
NetD12_2: D12.2 SW12.2 | length 228.3
  Top Layer w8: D12.2 4500,5100 SW12.2
NetD13_2: D13.2 SW13.2 | length 96.6
  Top Layer w8: SW13.2 2293.5,4339 D13.2@2388.66,4339
NetD14_2: D14.2 SW14.2 | length 237.5
  Top Layer w8: D14.2@3540,4340 SW14.2
NetD15_2: D15.2 SW15.2 | length 215
  Top Layer w8: D15.2@2820,4340 SW15.2
NetD16_2: D16.2 SW16.2 | length 132.8
  Top Layer w8: D16.2@4415,4280 4470,4335 4470,4340 SW16.2
NetD17_2: D17.2 SW17.2 | length 91.7
  Top Layer w8: SW17.2 2293.5,3599 D17.2@2383.78,3599
NetD18_2: D18.2 SW18.2 | length 244.9
  Top Layer w8: D18.2@3559,3536.22 3713.72,3536.22 SW18.2
NetD19_2: D19.2 SW19.2 | length 215
  Top Layer w8: D19.2@2820,3600 SW19.2
NetD20_2: D20.2 SW20.2 | length 239.1
  Top Layer w8: D20.2@4299,3556.22 4476.22,3556.22 SW20.2
NetD21_1: D21.1 M6.2 | length 839.7
  Top Layer w8: M6.2 4540,6000 4549,6009 v1@5041,6009
  Bottom Layer w8: v1(5040,6010) D21.1@5040,6325
NetD21_2: D21.2 SW21.2 | length 225.1
  Top Layer w8: D21.2@5039,6556.22 5258.72,6556.22 SW21.2
NetD22_1: D22.1 M7.2 | length 125.4
  Top Layer w8: M7.2 4720,5853.53 4753.53,5820 D22.1@4825,5820
NetD22_2: D22.2 SW22.2 | length 200.7
  Top Layer w8: D22.2@5061.82,5820 SW22.2
NetD23_1: D23.1 M11.2 | length 273.8
  Top Layer w8: M11.2 4660,5147.33 4702.67,5190 4757.33,5190 4805,5142.33 4805,5081.22 D23.1 D23.1@4805,5080
NetD23_2: D23.2 SW23.2 | length 222.5
  Top Layer w8: D23.2 SW23.2
NetD24_1: D24.1 M12.2 | length 512.8
  Top Layer w8: M12.2 4380,4420 4390,4430 4760,4430 4805,4385 D24.1@4805,4340
NetD24_2: D24.2 SW24.2 | length 222.5
  Top Layer w8: D24.2@5040,4340 SW24.2
NetD25_1: D25.1 M13.2 | length 654.1
  Top Layer w8: M13.2 4420,3290 4430,3300 5039,3300 D25.1@5040,3300
NetD25_2: D25.2 SW25.2 | length 249.9
  Top Layer w8: D25.2@5039,3536.22 5102.78,3600 SW25.2
NetQ1_1: Q1.1 R27.2 | length 77
  Top Layer w8: R27.2@3225,3730 3229.8,3734.8 Q1.1
NetR1_2: R1.2 SW1.3 | length 71.7
  Top Layer w8: R1.2 2438.5,6164 SW1.3
NetR2_2: R2.2 SW2.3 | length 81
  Top Layer w8: SW2.3 3930,6162.5 R2.2
NetR3_2: R3.2 SW3.3 | length 81.5
  Top Layer w8: SW3.3 3188.5,6163.5 R3.2
NetR4_2: R4.2 SW4.3 | length 80
  Top Layer w8: SW4.3 R4.2
NetR5_2: R5.2 SW5.3 | length 66
  Top Layer w8: SW5.3 R5.2
NetR6_2: R6.2 SW6.3 | length 72.5
  Top Layer w8: SW6.3 R6.2
NetR7_2: R7.2 SW7.3 | length 75
  Top Layer w8: SW7.3 R7.2
NetR8_2: R8.2 SW8.3 | length 70
  Top Layer w8: SW8.3 R8.2
NetR9_2: R9.2 SW9.3 | length 75
  Top Layer w8: SW9.3@2445,4680 R9.2
NetR10_2: R10.2 SW10.3 | length 72.5
  Top Layer w8: SW10.3 R10.2
NetR11_2: R11.2 SW11.3 | length 75
  Top Layer w8: SW11.3 R11.2
NetR12_2: R12.2 SW12.3 | length 70
  Top Layer w8: SW12.3 R12.2
NetR13_2: R13.2 SW13.3 | length 77.5
  Top Layer w8: SW13.3 R13.2
NetR14_2: R14.2 SW14.3 | length 72.5
  Top Layer w8: SW14.3 R14.2
NetR15_2: R15.2 SW15.3 | length 75
  Top Layer w8: SW15.3 R15.2
NetR16_2: R16.2 SW16.3 | length 90
  Top Layer w8: SW16.3 R16.2
NetR17_2: R17.2 SW17.3 | length 71.7
  Top Layer w8: R17.2 2438.5,3204 SW17.3
NetR18_2: R18.2 SW18.3 | length 109.3
  Top Layer w8: SW18.3 3927.5,3207.5 3950,3230 R18.2@4020,3230
NetR19_2: R19.2 SW19.3 | length 96.5
  Top Layer w8: SW19.3@3188.5,3203.5 SW19.3 3225,3240 R19.2
NetR20_2: R20.2 SW20.3 | length 123
  Top Layer w8: SW20.3 4701.5,3231.5 R20.2
NetR21_2: R21.2 SW21.3 | length 90
  Top Layer w8: SW21.3@5410,6160 SW21.3 R21.2
NetR22_2: R22.2 SW22.3 | length 93.3
  Top Layer w8: SW22.3@5415,5420 5435,5440 R22.2
NetR23_2: R23.2 SW23.3 | length 67.5
  Top Layer w8: SW23.3 R23.2
NetR24_2: R24.2 SW24.3 | length 67.5
  Top Layer w8: SW24.3 R24.2
NetR25_2: R25.2 SW25.3 | length 81
  Top Layer w8: R25.2 5410,3202.5 SW25.3
P1_PWM_IN: M5.2 P1.15 | length 1970.2
  Top Layer w8: v1(2135,3690) 3110,3690 M5.2
  Bottom Layer w8: P1.15 2125,4555 2125,3680 v1(2135,3690)
P2_PWM_IN: M8.2 P2.15 | length 2981.5
  Top Layer w8: M8.2 3610,3765 v1(3635,3790)
  Bottom Layer w8: v1@3635,3785 3606,3814 3606,4169.62 3620,4183.62 3620,6660 P2.15
P3_PWM_IN: M9.2 P3.15 | length 857.7
  Top Layer w8: v1(3345,3235) 3350,3230 v1(3650,3230) ; v1(3370,3550) 3380,3560 M9.2
  Bottom Layer w8: v1(3345,3235) 3390.5,3280.5 3390.5,3422.99 3390,3423.49 3390,3530 v1(3370,3550) ; P3.15 3642,3082 3642,3222 v1(3650,3230)
P4_PWM_IN: M10.2 P4.15 | length 3055.5
  Top Layer w8: M10.2 3705,3640 v1(3715,3650) ; v1@3685,4605 P4.15@5680,4605
  Bottom Layer w8: v1@3680,4595 3680,4220.99 3622,4162.99 3622,4103 3700,4025 3700,3650
  other v1: 3680,4605
pads on no net: SW1.5 SW1.6 SW1.7 SW2.5 SW2.6 SW2.7 SW3.5 SW3.6 SW3.7 SW4.5 SW4.6 SW4.7 SW5.5 SW5.6 SW5.7 SW6.5 SW6.6 SW6.7 SW7.5 SW7.6 SW7.7 SW8.5 SW8.6 SW8.7 SW9.5 SW9.6 SW9.7 SW10.5 SW10.6 SW10.7 SW11.5 SW11.6 SW11.7 SW12.5 SW12.6 SW12.7 SW13.5 SW13.6 SW13.7 SW14.5 SW14.6 SW14.7 SW15.5 SW15.6 SW15.7 SW16.5 SW16.6 SW16.7 SW17.5 SW17.6 SW17.7 SW18.5 SW18.6 SW18.7 SW19.5 SW19.6 SW19.7 SW20.5 SW20.6 SW20.7 SW21.5 SW21.6 SW21.7 SW22.5 SW22.6 SW22.7 SW23.5 SW23.6 SW23.7 SW24.5 SW24.6 SW24.7 SW25.5 SW25.6 SW25.7

## Keep-outs
Keep-Out Layer:
  lines w5: 5725,3035 2015,3035 2015,6725 5725,6725
  lines w6: 5725,3035 5725,6725

## Silkscreen, mask and mechanical layers (free items; w line width, h text height)
Drill Drawing:
  text ".LEGEND" at 5950,3200 h60
  text "Drill Drawing." at 5950,3100 h60

## Dimensions
2015,3035 to 5725,3035 on Mechanical 1
2015,3035 to 2015,6725 on Mechanical 1

## Text inside footprints (layer, text, board x,y; h text height)
M1: Top Overlay "1" at 2680,4538 h25; Top Overlay "3" at 2856,4538 h25
M2: Top Overlay "3" at 3566,3848 h25; Top Overlay "1" at 3390,3848 h25
M3: Top Overlay "1" at 3330,4532 h25 r180; Top Overlay "3" at 3154,4532 h25 r180
M4: Top Overlay "3" at 4735,4385 h25; Top Overlay "1" at 4590,4328 h25
M5: Top Overlay "1" at 3115,3790 h25; Top Overlay "3" at 3115,3585 h25
M6: Top Overlay "3" at 4626,5968 h25; Top Overlay "1" at 4450,5968 h25
M7: Top Overlay "3" at 4806,5848 h25; Top Overlay "1" at 4630,5848 h25
M8: Top Overlay "3" at 3696,3728 h25; Top Overlay "1" at 3520,3728 h25
M9: Top Overlay "1" at 3470,3590 h25; Top Overlay "3" at 3275,3585 h25
M10: Top Overlay "1" at 3660,3535 h25; Top Overlay "3" at 3705,3690 h25
M11: Top Overlay "1" at 4570,5108 h25; Top Overlay "3" at 4746,5108 h25
M12: Top Overlay "3" at 4466,4388 h25; Top Overlay "1" at 4290,4388 h25
M13: Top Overlay "1" at 4330,3248 h25; Top Overlay "3" at 4505,3295 h25
SW1: Bottom Overlay "1" at 2622.5,6480 h60; Bottom Overlay "LED" at 2477.5,6050 h60
SW2: Bottom Overlay "1" at 4107.5,6480 h60; Bottom Overlay "LED" at 3962.5,6050 h60
SW3: Bottom Overlay "1" at 3365,6480 h60; Bottom Overlay "LED" at 3220,6050 h60
SW4: Bottom Overlay "1" at 4850,6480 h60; Bottom Overlay "LED" at 4705,6050 h60
SW5: Bottom Overlay "1" at 2622.5,5740 h60; Bottom Overlay "LED" at 2477.5,5310 h60
SW6: Bottom Overlay "1" at 4107.5,5740 h60; Bottom Overlay "LED" at 3962.5,5310 h60
SW7: Bottom Overlay "1" at 3365,5740 h60; Bottom Overlay "LED" at 3220,5310 h60
SW8: Bottom Overlay "1" at 4850,5740 h60; Bottom Overlay "LED" at 4705,5310 h60
SW9: Bottom Overlay "1" at 2630,4970 h60; Bottom Overlay "LED" at 2477.5,4570 h60
SW10: Bottom Overlay "1" at 4107.5,5000 h60; Bottom Overlay "LED" at 3962.5,4570 h60
SW11: Bottom Overlay "1" at 3380,4965 h60; Bottom Overlay "LED" at 3220,4570 h60
SW12: Bottom Overlay "1" at 4850,5000 h60; Bottom Overlay "LED" at 4705,4570 h60
SW13: Bottom Overlay "1" at 2625,4220 h60; Bottom Overlay "LED" at 2477.5,3830 h60
SW14: Bottom Overlay "1" at 4107.5,4260 h60; Bottom Overlay "LED" at 3962.5,3830 h60
SW15: Bottom Overlay "1" at 3365,4220 h60; Bottom Overlay "LED" at 3220,3830 h60
SW16: Bottom Overlay "1" at 4850,4260 h60; Bottom Overlay "LED" at 4705,3830 h60
SW17: Bottom Overlay "1" at 2625,3490 h60; Bottom Overlay "LED" at 2477.5,3090 h60
SW18: Bottom Overlay "1" at 4107.5,3520 h60; Bottom Overlay "LED" at 3962.5,3090 h60
SW19: Bottom Overlay "1" at 3355,3460 h60; Bottom Overlay "LED" at 3220,3090 h60
SW20: Bottom Overlay "1" at 4850,3520 h60; Bottom Overlay "LED" at 4700,3245 h60
SW21: Bottom Overlay "1" at 5610,6430 h60; Bottom Overlay "LED" at 5440,6050 h60
SW22: Bottom Overlay "1" at 5592.5,5740 h60; Bottom Overlay "LED" at 5447.5,5310 h60
SW23: Bottom Overlay "1" at 5592.5,5000 h60; Bottom Overlay "LED" at 5447.5,4570 h60
SW24: Bottom Overlay "1" at 5592.5,4260 h60; Bottom Overlay "LED" at 5447.5,3830 h60
SW25: Bottom Overlay "1" at 5592.5,3520 h60; Bottom Overlay "LED" at 5447.5,3090 h60